# Altium PCB version2.PcbDoc
Units mm, origin at the board's own origin, x right, y up, seen from the top; angles counter-clockwise.
Board outline 50.95 x 56.2 mm, 4 copper layers (Top Layer, Int1 (GND), Int2 (PWR), Bottom Layer), stack 1.586 mm thick; 28 components, 19 nets, 139 pads, 147 vias.
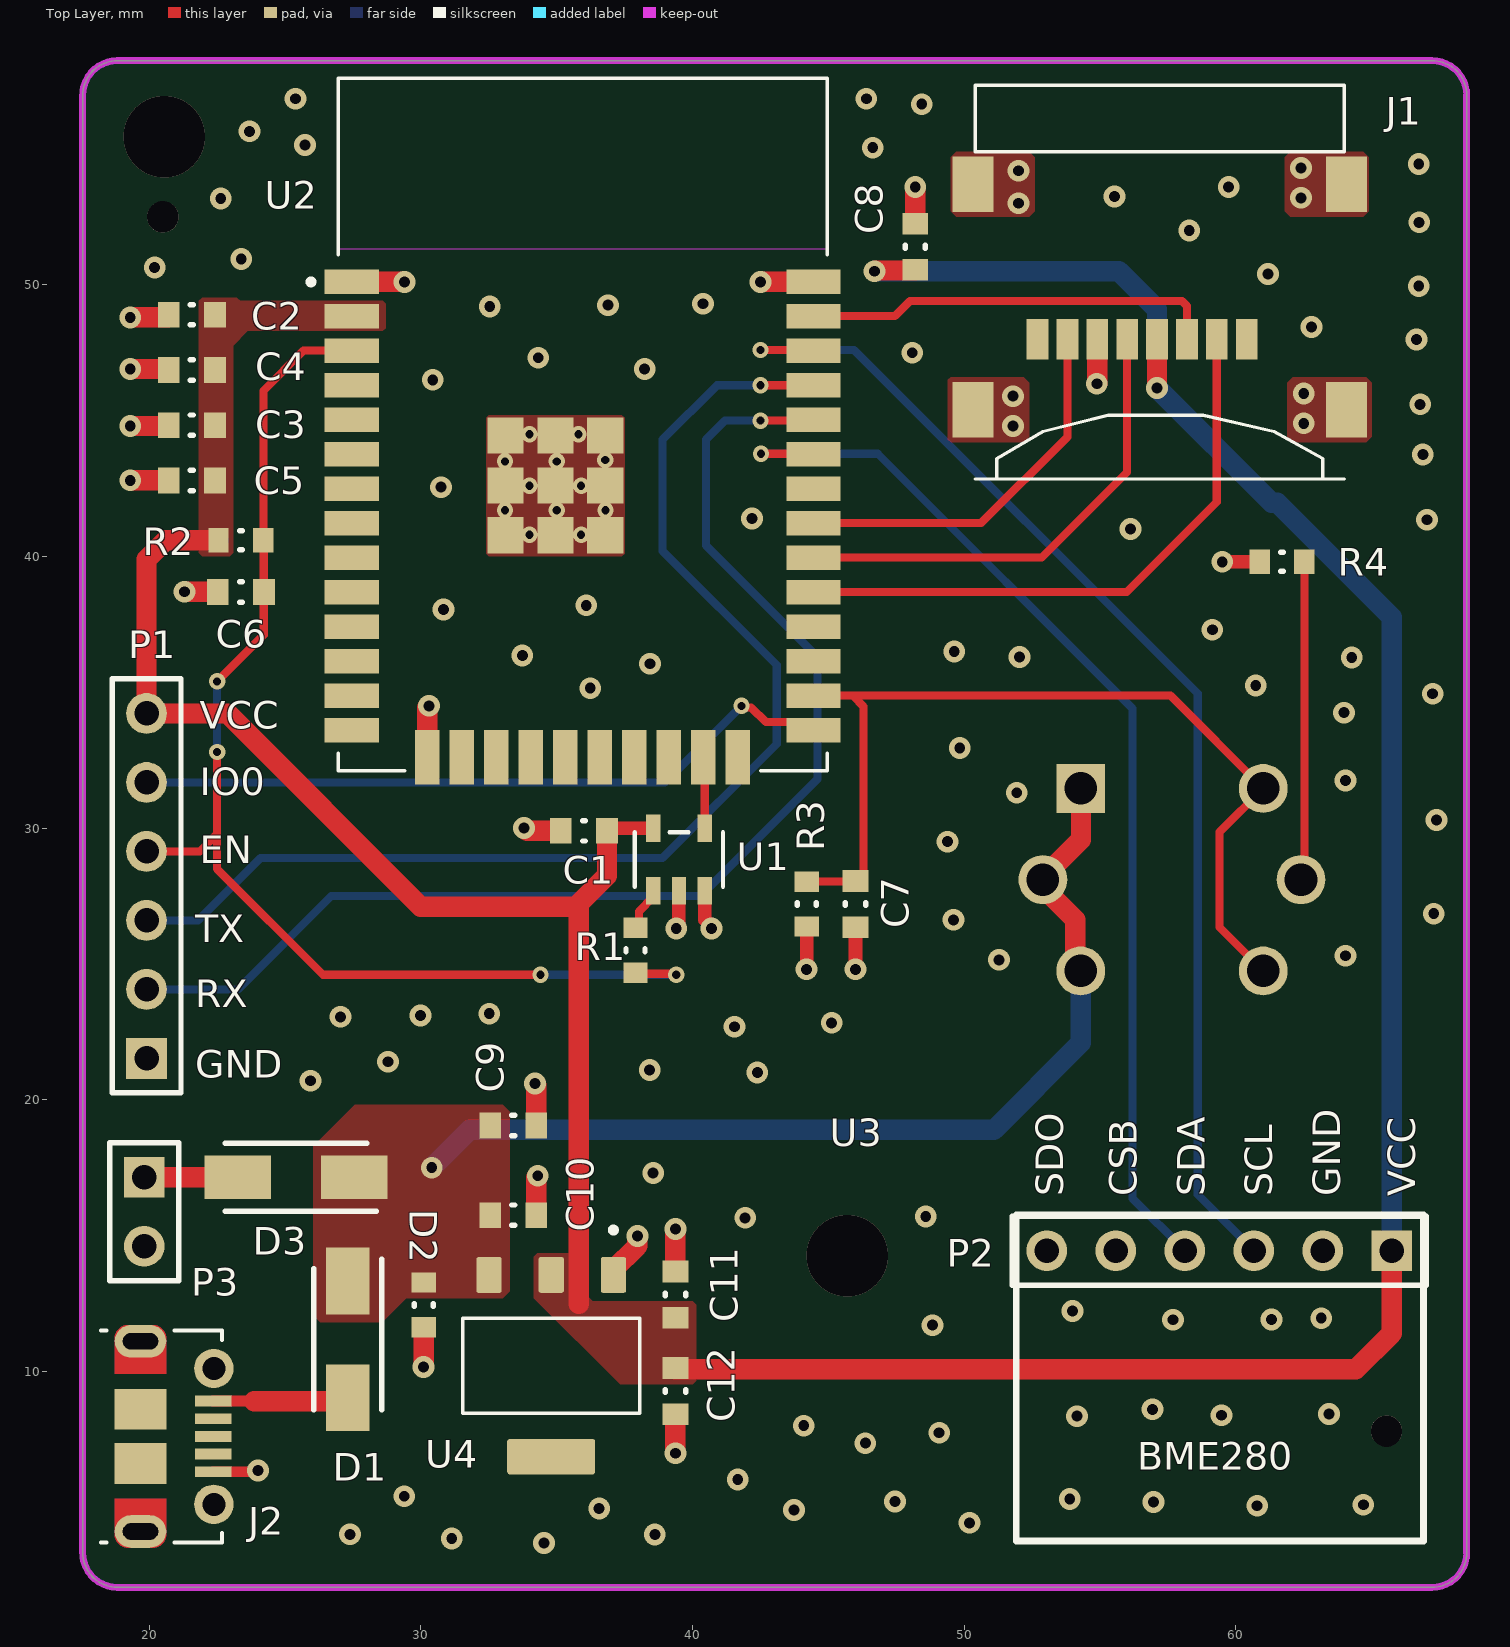
[diagram p0: Top Layer view]
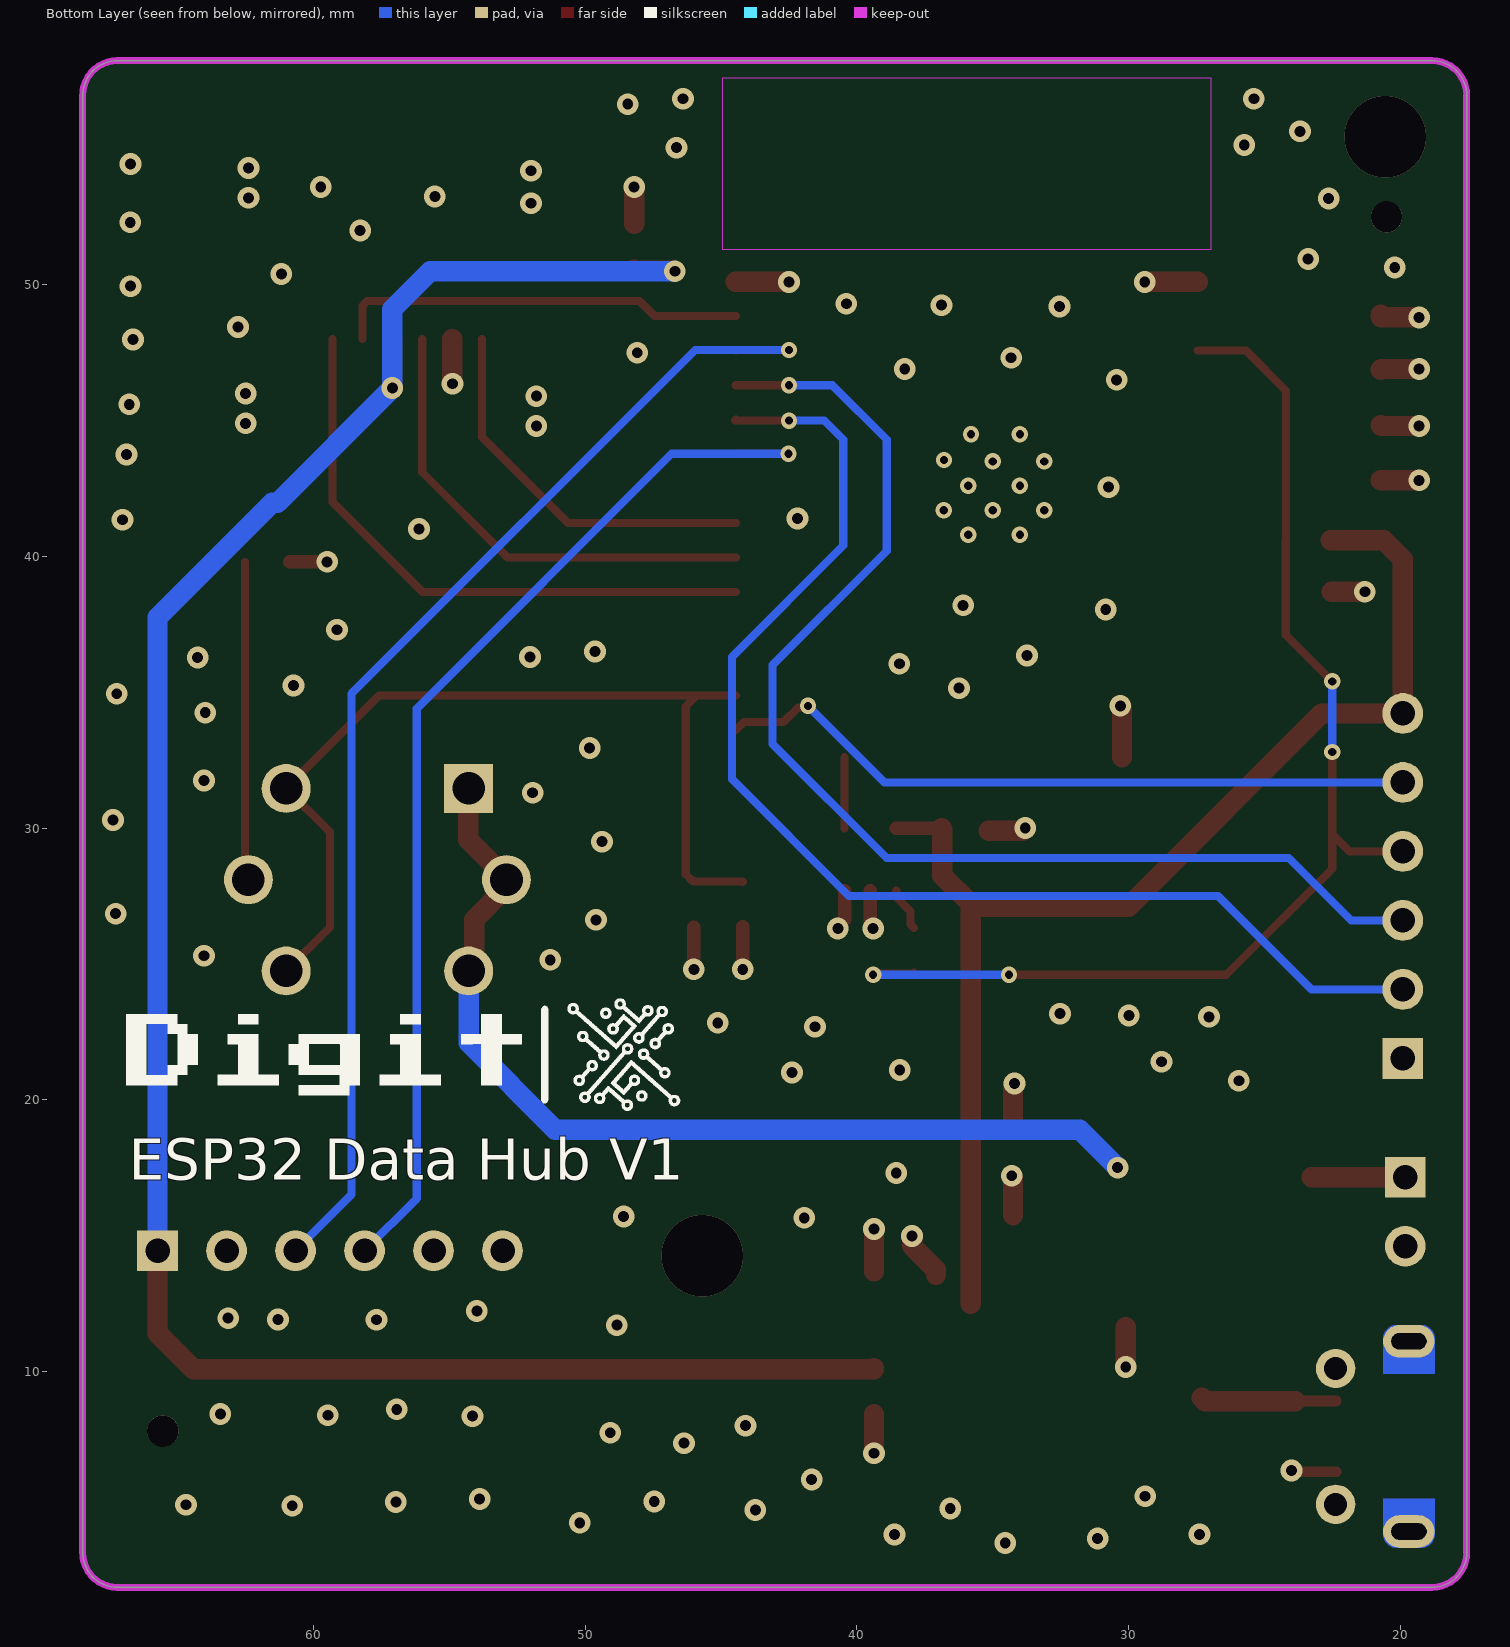
[diagram p1: Bottom Layer view, seen from below]
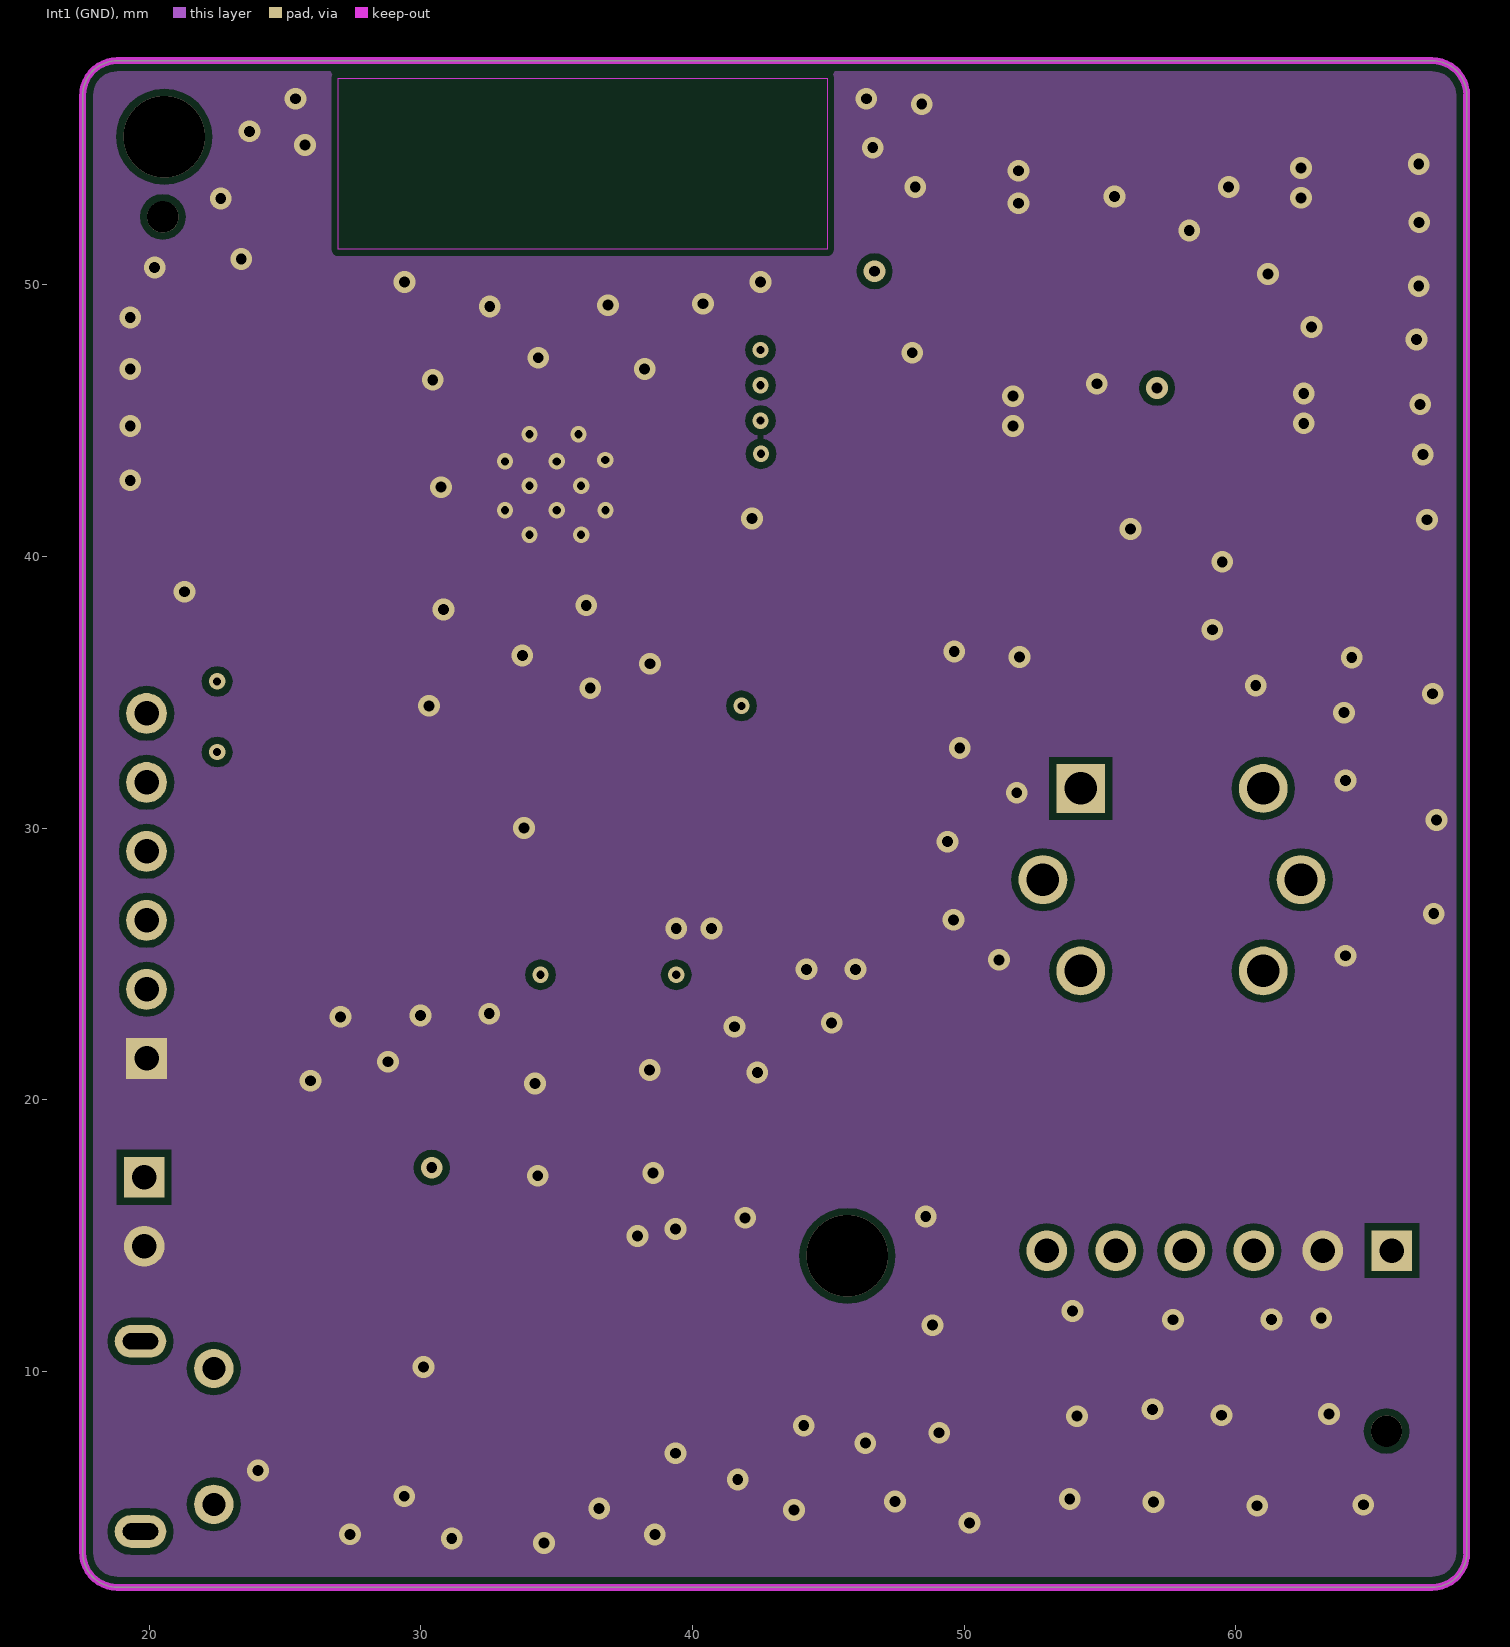
[diagram p2: Int1 (GND)]
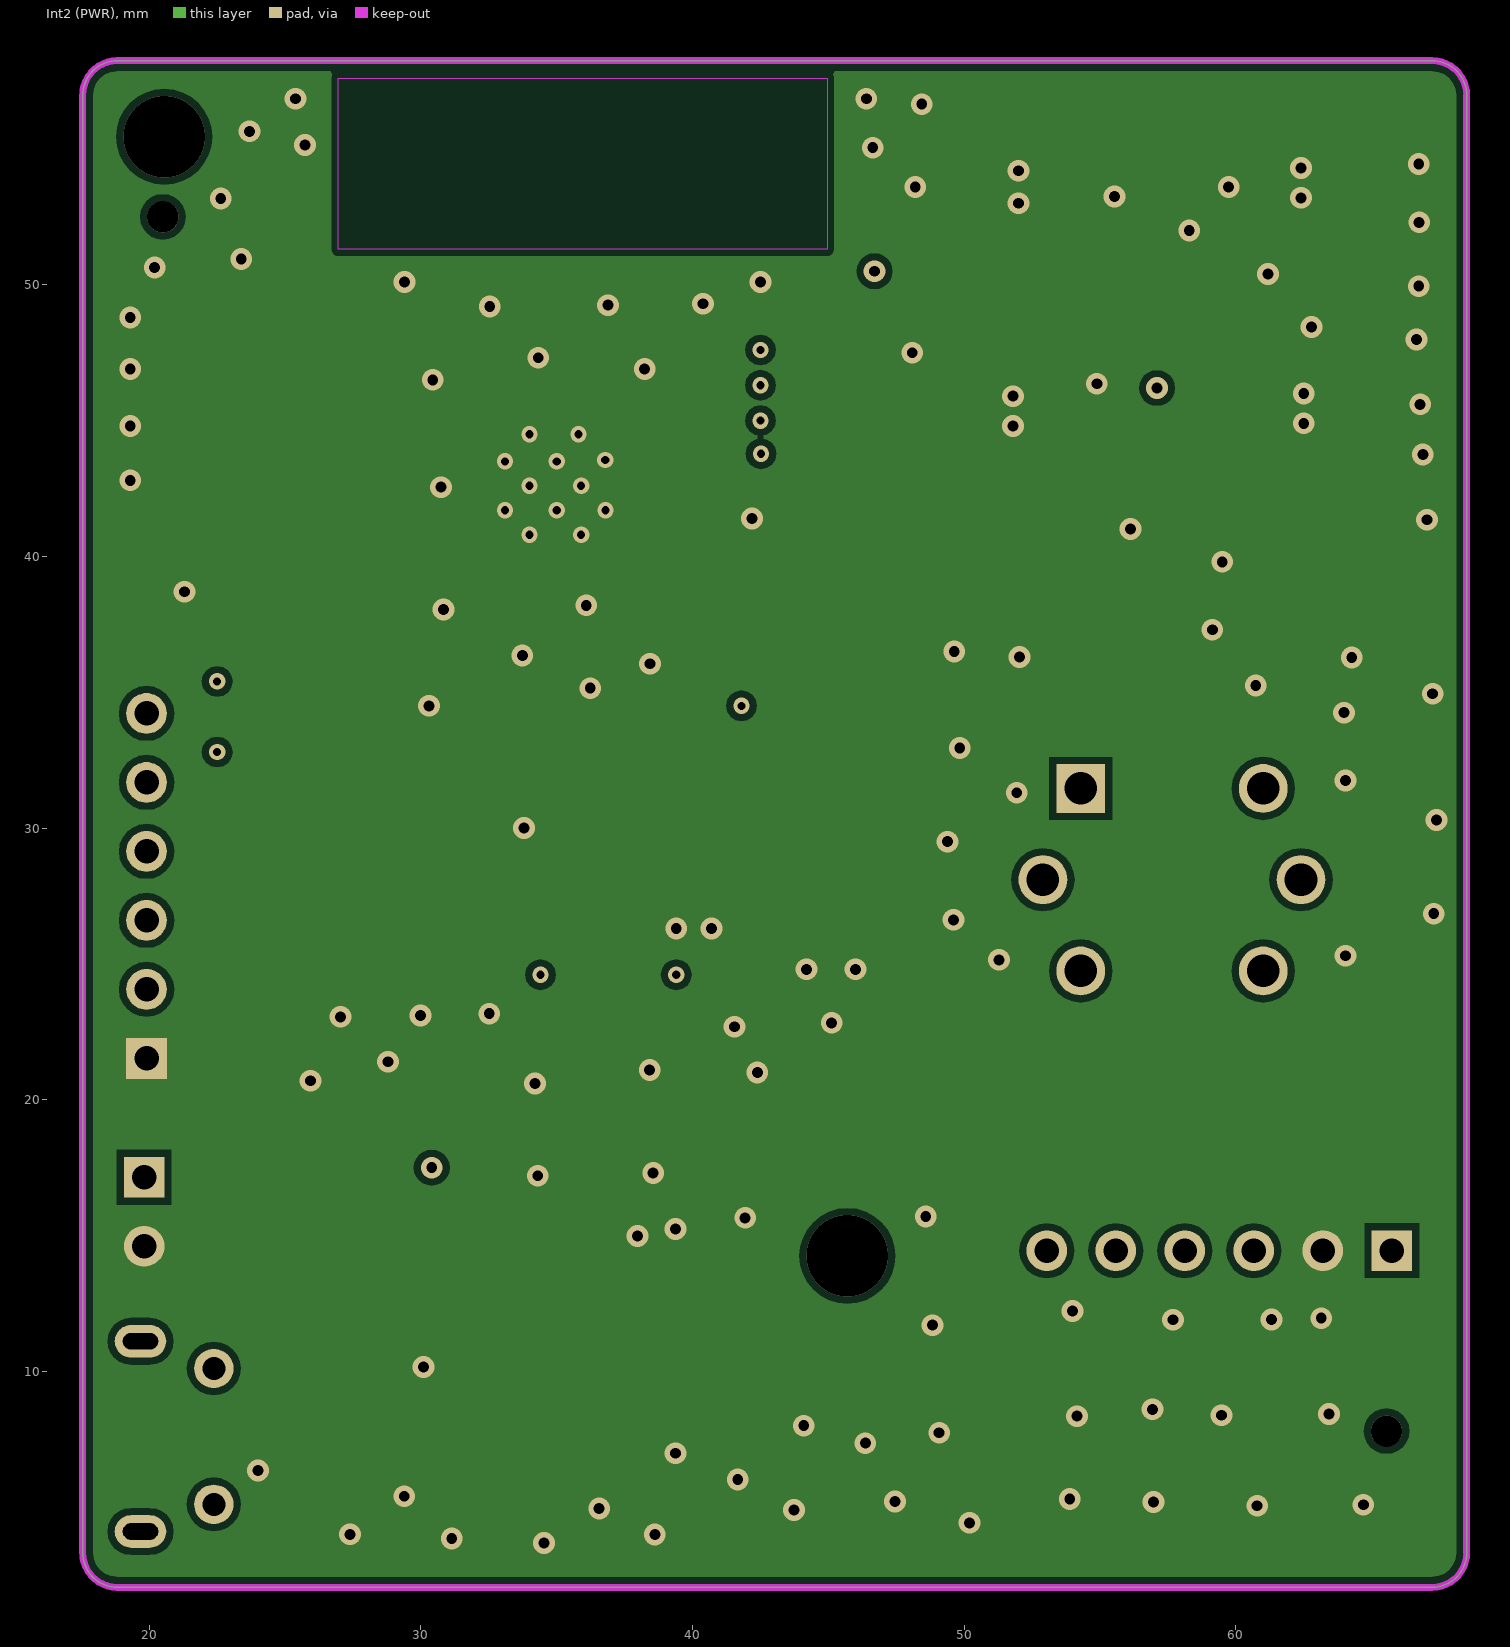
[diagram p3: Int2 (PWR)]
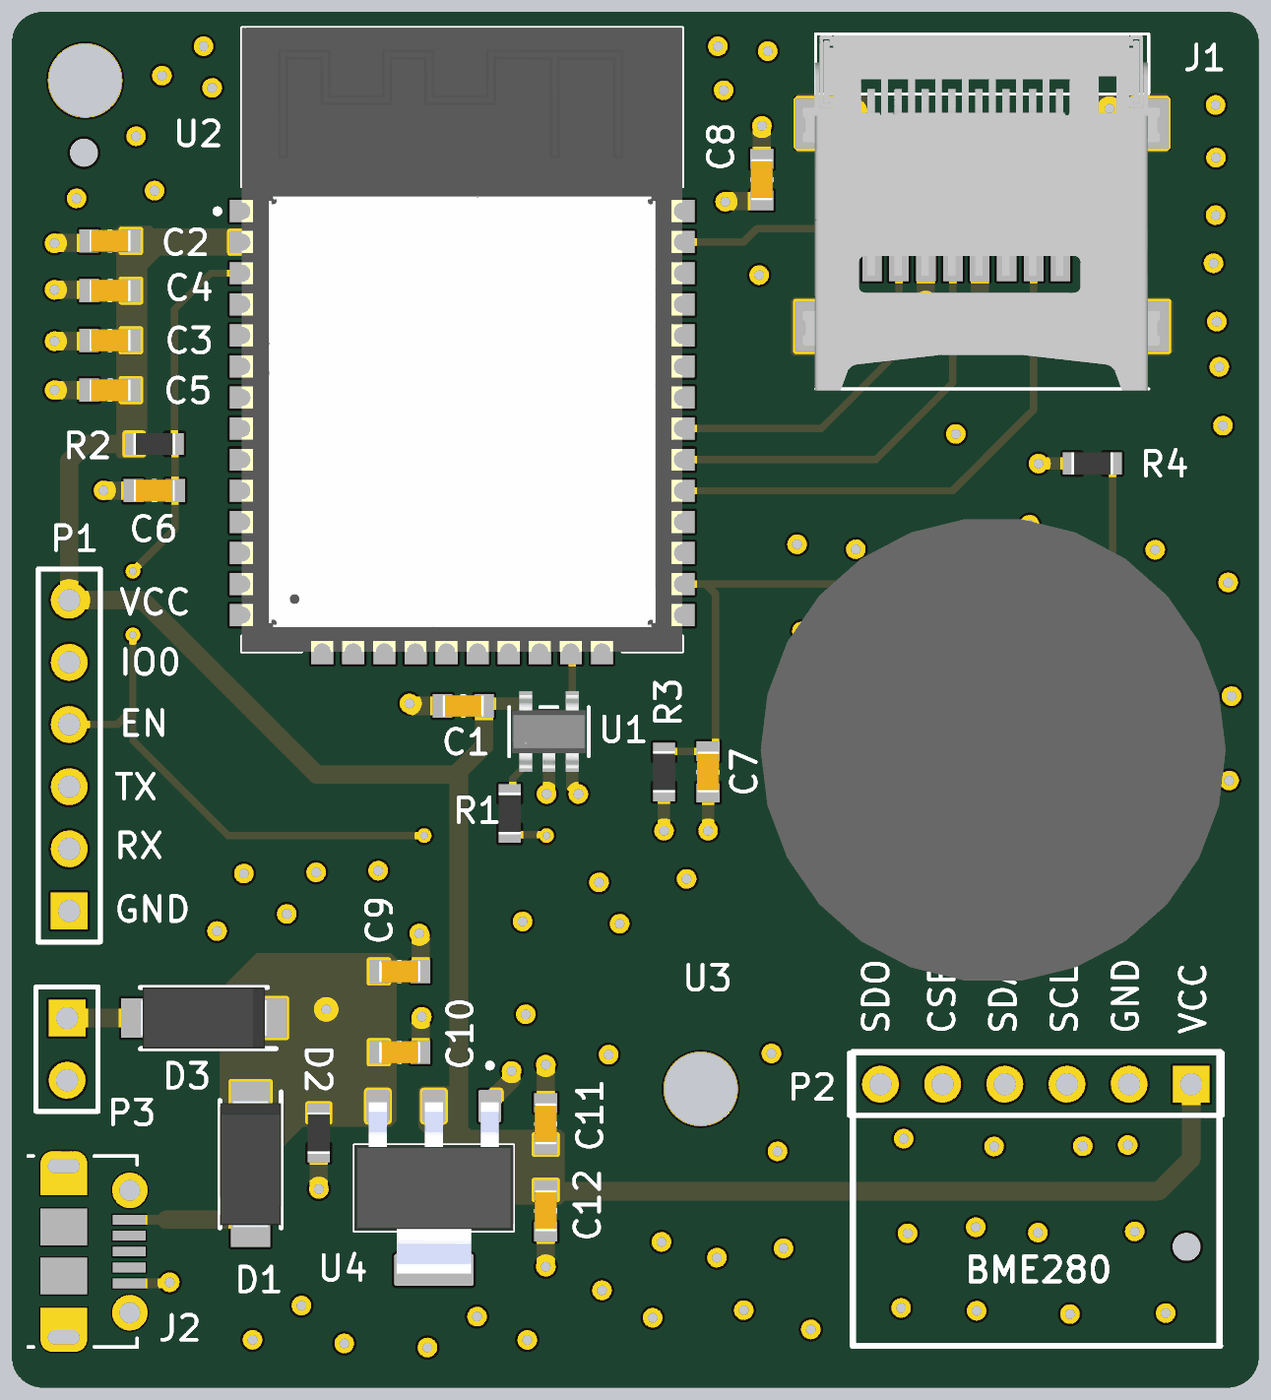
[diagram p4: 3D render of the assembled board from above, using the file's embedded part models]

## Layer stack, top to bottom
Top Solder: solder mask 0.0254, SM-001, Dk 4
Top Layer: signal copper 0.035
Dielectric 1: prepreg 0.2104, PP-017, Dk 4.6
Int1 (GND): signal copper 0.0152
Dielectric 3: core 1.065, Core-039, Dk 4.6
Int2 (PWR): signal copper 0.0152
Dielectric 5: prepreg 0.2104, PP-017, Dk 4.6
Bottom Layer: signal copper 0.035
Bottom Solder: solder mask 0.0254, SM-001, Dk 4

## Board outline
17.55,3.32 ccw(c18.82,3.32) 18.82,2.05 67.23,2.05 ccw(c67.23,3.32) 68.5,3.32 68.5,56.98 ccw(c67.23,56.98) 67.23,58.25 18.82,58.25 ccw(c18.82,56.98) 17.55,56.98

## Design rules (kind name [scope] priority, off if disabled: settings)
Clearance keepout [IsKeepOut] p1: gap=0.254 ignorepadtopadclearanceinfootprint=FALSE
Clearance [All] p2: gap=0.254 ignorepadtopadclearanceinfootprint=FALSE except(0: Arc-Hole Track-Hole SMDPad-Hole THPad-Hole Fill-Hole Poly-Hole Region-Hole Text-Hole; 0.127: SMDPad-SMDPad; 0.15: SMDPad-Text; 0.2: Arc-SMDPad Arc-THPad Track-SMDPad Track-THPad; 0.5: THPad-THPad Via-Hole)
PolygonConnect PowerPuddleConnect [All] p1: connectstyle=Direct reliefconductorwidth=0.254 reliefentries=4 polygonreliefangle="90 Angle" airgapwidth=0.254
PolygonConnect PowerPlaneConnect [(InNamedPolygon('InternalGndLayer1') AND InNamedPolygon('InternalGndLayer2'))] p2: connectstyle=Relief reliefconductorwidth=0.254 reliefentries=4 polygonreliefangle="90 Angle" airgapwidth=0.254
RoutingVias [All] p1: holewidth=0.3 width=0.3 viastyle="Through Hole" minholewidth=0.2 minwidth=0.25 maxholewidth=6.3 maxwidth=6.3
SolderMaskExpansion [All] p1: expansion=0.102 istentingtop=FALSE
Width [All] p1: maxlimit=1 minlimit=0.127 preferedwidth=0.3
30 further rules are at their usual default settings.

## Classes and differential pairs
component class main: C1 C2 C3 C4 C5 C6 C7 C8 C9 C10 C11 C12 D1 D2 D3 J1 J2 P2 P3 R1 R2 R3 R4 U1 U3 U4

## Components (designator, comment, footprint, x,y, rotation, side; value= is the part's Value field where it differs from the comment)
C1 "100nF" CAP_0603 36,29.9 r180 top
C2 "100nF" CAP_0603 21.567,48.897 r0 top
C3 "100nF" CAP_0603 21.567,44.833 r0 top
C4 "100nF" CAP_0603 21.567,46.865 r0 top
C5 "10uF" CAP_0603 21.567,42.801 r0 top
C6 "100nF" CAP_0603 23.375,38.695 r0 top
C7 "100nF" CAP_0603 46,27.2 r90 top
C8 "100nF" CAP_0603 48.2,51.4 r90 top
C9 "10uF" CAP_0603 33.401,19.05 r180 top
C10 "100nF" CAP_0603 33.401,15.748 r180 top
C11 "100nF" CAP_0603 39.37,12.827 r270 top
C12 "10uF" CAP_0603 39.37,9.271 r90 top
D1 "CDBA240LL-HF" DIOM5225X250N 27.305,11.176 r270 top
D2 "SLESDL0603-12" TVS0603 30.099,12.446 r90 top
D3 "CDBA240LL-HF" DIOM5225X250N 25.4,17.145 r180 top
J1 "47219-2001" 47219-2001 60.4,48 r0 top
J2 "1050170001" MOLEX-1050170001 19.677,8.605 r270 top
P1 "Header 6" HDR1X6 19.9,21.52 r90 top
P2 "Header 6" HDR1X6 65.744,14.442 r180 top
P3 "Header 2" HDR1X2 19.812,17.145 r270 top
R1 "10k" RES_0603 37.9,25.5 r270 top
R2 "10k" RES_0603 23.375,40.6 r180 top
R3 "47k" RES_0603 44.2,27.2 r90 top
R4 "5.1R" RES_0603 61.7,39.8 r0 top
U1 "STWD100YNYWY3F" STWD100YNYWY3F 38.55,27.7 r90 top
U2 "ESP32-WROOM-32" ESP32-WROOM-32-Nx 27.453,50.117 r0 top
U3 "SEN-17049" SEN17049 54.291,31.459 r0 top
U4 "AMS1117-3.3" SOT229P700X180-4N 37.088,13.548 r270 top

## Footprints (in the part's own frame and the unit in brackets; to place one, negate y for a bottom-side part, rotate by r counter-clockwise, add the part's x,y. Pads: shape width x height; smd on the part's side, far side on the other; paste and mask are expansions set on the pad)
47219-2001 [mm] "Molex microSD"
  rect 0.8x1.5 smd: 1(0,0) 2(-1.1,0) 3(-2.2,0) 4(-3.3,0) 5(-4.4,0) 6(-5.5,0) 7(-6.6,0) 8(-7.7,0)
  rect 1.5x2.05 smd: G1(3.675,-2.6) G2(3.675,5.7) G3(-10.075,5.7) G4(-10.075,-2.6)
  silkscreen extent -10,-5.15 3.6,9.35, body extent -10.54,-5.22 4.06,9.28, height 1.87
CAP_0603 [mm] "Chip Capacitor, 2-Leads, Body 1,60x0,80mm, IPC Medium Density, 0603"
  rect 0.8x0.95 smd: 1(-0.85,0) 2(0.85,0)
  silkscreen extent -0.05,-0.38 0.05,0.38, body extent -0.85,-0.45 0.85,0.45, height 0.6
DIOM5225X250N [mm]
  rect 2.45x1.6 smd: 1(-2.15,0) 2(2.15,0)
  silkscreen extent -2.95,-1.25 2.6,1.25, body extent -2.6,-1.25 2.6,1.25, height 2.5
ESP32-WROOM-32-Nx [mm] "SMD,18x25.5mm"
  rect 2x0.9 smd: 1(0,0) 2(0,-1.27) 3(0,-2.54) 4(0,-3.81) 5(0,-5.08) 6(0,-6.35) 7(0,-7.62) 8(0,-8.89) 9(0,-10.16) 10(0,-11.43) 11(0,-12.7) 12(0,-13.97) 13(0,-15.24) 14(0,-16.51) 25(17,-16.51) 26(17,-15.24) 27(17,-13.97) 28(17,-12.7) 29(17,-11.43) 30(17,-10.16) 31(17,-8.89) 32(17,-7.62) 33(17,-6.35) 34(17,-5.08) 35(17,-3.81) 36(17,-2.54) 37(17,-1.27) 38(17,0)
  rect 0.9x2 smd: 15(2.785,-17.51) 16(4.055,-17.51) 17(5.325,-17.51) 18(6.595,-17.51) 19(7.865,-17.51) 20(9.135,-17.51) 21(10.405,-17.51) 22(11.675,-17.51) 23(12.945,-17.51) 24(14.215,-17.51)
  rect 1.33x1.33 smd: 39(5.665,-9.335) 39(5.665,-7.5) 39(5.665,-5.665) 39(7.5,-9.335) 39(7.5,-7.5) 39(7.5,-5.665) 39(9.335,-9.335) 39(9.335,-7.5) 39(9.335,-5.665)
  Keep-Out Layer region: 17.5,1.19 -0.5,1.19 -0.5,7.49 17.5,7.49
  silkscreen extent -1.6,-18.01 17.5,7.49, body extent -0.5,-18.01 17.5,7.49, height 3.25
HDR1X2 [mm] "Connector; Header; 2 Position"
  rect 1.5x1.5 hole 0.9: 1(0,0)
  round 1.5 hole 0.9: 2(2.54,0)
  silkscreen extent -1.27,-1.27 3.81,1.27
HDR1X6 [mm] "Connector; Header; 6 Position"
  rect 1.5x1.5 hole 0.9: 1(0,0)
  round 1.5 hole 0.9: 2(2.54,0) 3(5.08,0) 4(7.62,0) 5(10.16,0) 6(12.7,0)
  silkscreen extent -1.27,-1.27 13.97,1.27
MOLEX-1050170001 [mm]
  rect 0.4x1.35 smd mask+0.064: 1(-0.3,2.675) 2(0.35,2.675) 3(1,2.675) 4(1.65,2.675) 5(2.3,2.675)
  oval 1.2x1.9 hole 0.6 slot 1.3 at 90 deg mask+0: SH(-2.5,0) SH(4.5,0)
  round 1.45 hole 0.85 mask+0.064: SH(-1.5,2.7) SH(3.5,2.7)
  rect 1.5x1.9 smd mask+0.064: SH(0,0) SH(2,0)
  Top Layer region: 4.626,0.949 4.652,0.947 4.678,0.944 4.704,0.939 4.729,0.933 4.755,0.926 4.779,0.917 4.803,0.907 4.827,0.896 4.85,0.883 4.872,0.869 4.894,0.855 4.915,0.839 4.935,0.822 4.954,0.804 4.972,0.785 4.989,0.765 5.005,0.744 5.019,0.722 5.033,0.7 5.046,0.677 5.057,0.653 5.067,0.629 5.076,0.605 5.083,0.579 5.089,0.554 5.094,0.528 5.097,0.502 5.099,0.476 5.1,0.45 5.1,-0.45 5.099,-0.476 5.097,-0.502 5.094,-0.528 5.089,-0.554 5.083,-0.579 5.076,-0.605 5.067,-0.629 5.057,-0.653 5.046,-0.677 5.033,-0.7 5.019,-0.722 5.005,-0.744 4.989,-0.765 4.972,-0.785 4.954,-0.804 4.935,-0.822 4.915,-0.839 4.894,-0.855 4.872,-0.869 4.85,-0.883 4.827,-0.896 4.803,-0.907 4.779,-0.917 4.755,-0.926 4.729,-0.933 4.704,-0.939 4.678,-0.944 4.652,-0.947 4.626,-0.949 4.6,-0.95 3.3,-0.95 3.3,0.95 4.6,0.95
  Top Layer region: -1.3,-0.95 -2.6,-0.95 -2.626,-0.949 -2.652,-0.947 -2.678,-0.944 -2.704,-0.939 -2.729,-0.933 -2.755,-0.926 -2.779,-0.917 -2.803,-0.907 -2.827,-0.896 -2.85,-0.883 -2.872,-0.869 -2.894,-0.855 -2.915,-0.839 -2.935,-0.822 -2.954,-0.804 -2.972,-0.785 -2.989,-0.765 -3.005,-0.744 -3.019,-0.722 -3.033,-0.7 -3.046,-0.677 -3.057,-0.653 -3.067,-0.629 -3.076,-0.605 -3.083,-0.579 -3.089,-0.554 -3.094,-0.528 -3.097,-0.502 -3.099,-0.476 -3.1,-0.45 -3.1,0.45 -3.099,0.476 -3.097,0.502 -3.094,0.528 -3.089,0.554 -3.083,0.579 -3.076,0.605 -3.067,0.629 -3.057,0.653 -3.046,0.677 -3.033,0.7 -3.019,0.722 -3.005,0.744 -2.989,0.765 -2.972,0.785 -2.954,0.804 -2.935,0.822 -2.915,0.839 -2.894,0.855 -2.872,0.869 -2.85,0.883 -2.827,0.896 -2.803,0.907 -2.779,0.917 -2.755,0.926 -2.729,0.933 -2.704,0.939 -2.678,0.944 -2.652,0.947 -2.626,0.949 -2.6,0.95 -1.3,0.95
  Bottom Layer region: -1.3,-0.95 -2.6,-0.95 -2.626,-0.949 -2.652,-0.947 -2.678,-0.944 -2.704,-0.939 -2.729,-0.933 -2.755,-0.926 -2.779,-0.917 -2.803,-0.907 -2.827,-0.896 -2.85,-0.883 -2.872,-0.869 -2.894,-0.855 -2.915,-0.839 -2.935,-0.822 -2.954,-0.804 -2.972,-0.785 -2.989,-0.765 -3.005,-0.744 -3.019,-0.722 -3.033,-0.7 -3.046,-0.677 -3.057,-0.653 -3.067,-0.629 -3.076,-0.605 -3.083,-0.579 -3.089,-0.554 -3.094,-0.528 -3.097,-0.502 -3.099,-0.476 -3.1,-0.45 -3.1,0.45 -3.099,0.476 -3.097,0.502 -3.094,0.528 -3.089,0.554 -3.083,0.579 -3.076,0.605 -3.067,0.629 -3.057,0.653 -3.046,0.677 -3.033,0.7 -3.019,0.722 -3.005,0.744 -2.989,0.765 -2.972,0.785 -2.954,0.804 -2.935,0.822 -2.915,0.839 -2.894,0.855 -2.872,0.869 -2.85,0.883 -2.827,0.896 -2.803,0.907 -2.779,0.917 -2.755,0.926 -2.729,0.933 -2.704,0.939 -2.678,0.944 -2.652,0.947 -2.626,0.949 -2.6,0.95 -1.3,0.95
  Bottom Layer region: 4.626,0.949 4.652,0.947 4.678,0.944 4.704,0.939 4.729,0.933 4.755,0.926 4.779,0.917 4.803,0.907 4.827,0.896 4.85,0.883 4.872,0.869 4.894,0.855 4.915,0.839 4.935,0.822 4.954,0.804 4.972,0.785 4.989,0.765 5.005,0.744 5.019,0.722 5.033,0.7 5.046,0.677 5.057,0.653 5.067,0.629 5.076,0.605 5.083,0.579 5.089,0.554 5.094,0.528 5.097,0.502 5.099,0.476 5.1,0.45 5.1,-0.45 5.099,-0.476 5.097,-0.502 5.094,-0.528 5.089,-0.554 5.083,-0.579 5.076,-0.605 5.067,-0.629 5.057,-0.653 5.046,-0.677 5.033,-0.7 5.019,-0.722 5.005,-0.744 4.989,-0.765 4.972,-0.785 4.954,-0.804 4.935,-0.822 4.915,-0.839 4.894,-0.855 4.872,-0.869 4.85,-0.883 4.827,-0.896 4.803,-0.907 4.779,-0.917 4.755,-0.926 4.729,-0.933 4.704,-0.939 4.678,-0.944 4.652,-0.947 4.626,-0.949 4.6,-0.95 3.3,-0.95 3.3,0.95 4.6,0.95
  silkscreen extent -2.9,-1.45 4.9,3
RES_0603 [mm] "Chip Resistor, 2-Leads, Body 1,60x0,80mm, IPC Medium Density, 0603"
  rect 0.75x0.9 smd: 1(-0.825,0) 2(0.825,0)
  silkscreen extent -0.05,-0.35 0.05,0.35, body extent -0.85,-0.45 0.85,0.45, height 0.6
SEN17049 [mm]
  rect 1.8x1.8 hole 1.2: 1(0,0)
  round 1.8 hole 1.2: 2(-1.391,-3.359) 3(0,-6.718) 4(6.718,-6.718) 5(8.109,-3.359) 6(6.718,0)
  body extent -6.14,-12.86 12.86,6.14, height 20.1
SOT229P700X180-4N [mm] "AMS1117-3.3"
  rrect15% 1.31x0.93 smd: 1(0,0) 2(0,-2.29) 3(0,-4.58)
  rrect15% 1.31x3.24 smd: 4(6.69,-2.29)
  silkscreen extent -1.75,-5.54 5.1,0.96, body extent -0.15,-5.54 6.84,0.96, height 1.8
STWD100YNYWY3F [mm] "SOT-23-5"
  rect 1.01x0.528 smd paste+0 mask+0: 1(0,0) 2(0,-0.95) 3(0,-1.9) 4(2.288,-1.9) 5(2.288,0)
  silkscreen extent 0.14,-2.58 2.15,0.68, body extent -0.36,-2.45 2.64,0.55, height 1.45
TVS0603 [mm] "SLESDL0603-12"
  rect 0.75x0.9 smd: 1(-0.825,0) 2(0.825,0)
  silkscreen extent -0.05,-0.35 0.05,0.35, body extent -0.85,-0.45 0.85,0.45, height 0.6

## Part data
C1 C2 C3 C4 C5 C6 C7 C8 C9 C10 C11 C12: library part Cap_0603, "Capacitor SMD 0603 Generic"
D1 D3: "Diode", Manufacturer_Name="Comchip Technology", Mouser Part Number=750-CDBA240LL-HF, Arrow Part Number=CDBA240LL-HF, Arrow Price/Stock=https://www.arrow.com/en/products/cdba240ll-hf/comchip-technology?region=nac, Datasheet Link=https://datasheet.datasheetarchive.com/originals/distributors/Datasheets-DGA22/1401764.pdf, Height=2.5mm, Manufacturer_Part_Number=CDBA240LL-HF, Mouser Price/Stock=https://www.mouser.co.uk/ProductDetail/Comchip-Technology/CDBA240LL-HF?qs=2qJf6qQ4IOK8%252BRkX5aZc7g%3D%3D
D2: library part TVSDiode0603, "Ultra low capacitance (1.5pF typ.) / Very low leakage current / Fast response time / Bi-directional / max.12V / C.V. = 100V max."
J1: library part "microSD Card Conn", "1.1mm Pitch microSD Card Connector, Hinge Type, Lead Free"
J2: library part Molex_1050170001, "USB - micro B USB 2.0 Receptacle Connector 5 Position Surface Mount, Right Angle; Through Hole"
P1 P2: "Header, 6-Pin", LatestRevisionDate=17-Jul-2002, LatestRevisionNote="Re-released for DXP Platform.", Publisher="Altium Limited"
P3: "Header, 2-Pin", LatestRevisionDate=17-Jul-2002, LatestRevisionNote="Re-released for DXP Platform.", Publisher="Altium Limited"
R1 R2 R3 R4: library part Res_0603, "Resistor SMD 0603 Generic"
U1: "1.12s Active Low 1 SOT-23-5 Monitors & Reset Circuits ROHS"
U2: library part ESP32-WROOM-32-Nx, "Bluetooth, WiFi 802.11b/g/n, Bluetooth v4.2 +EDR, Class 1, 2 and 3 Transceiver Module 2.4GHz ~ 2.5GHz PCB Trace Surface Mount"
U3: "Undefined or Miscellaneous", Manufacturer_Name=SparkFun, Mouser Part Number=474-SEN-17049, Arrow Part Number=SEN-17049, Arrow Price/Stock=https://www.arrow.com/en/products/sen-17049/sparkfun-electronics?region=nac, Datasheet Link=https://eu.mouser.com/datasheet/2/813/MQ_2-1915159.pdf, Height=20mm, Manufacturer_Part_Number=SEN-17049, Mouser Price/Stock=https://www.mouser.co.uk/ProductDetail/SparkFun/SEN-17049?qs=DPoM0jnrROWDFAIFRzjoUQ%3D%3D
U4: "Sot223/Pkg 1-Amp 3.3-Volt Low Drop Out Voltage Regulatator"

## Free pads (board coordinates)
  round 1.152 hole 1.152 unplated: TH(20.5,52.5) TH(65.55,7.8)

## Via types
v1: diameter 0.8, hole 0.4, Top Layer to Bottom Layer, 124 vias
v2: diameter 0.6, hole 0.3, Top Layer to Bottom Layer, 21 vias
v3: diameter 3, hole 3, Top Layer to Bottom Layer, 2 vias

## Nets (pads, with @x,y where several pads share a name; then routed paths per layer and width w, separated by ;. In a path a pad name is that pad's centre, name@x,y a point inside that pad or via, vN(x,y) a via of type N, cw(c..) or ccw(c..) an arc to the next point about the centre after c; other vN are vias at no path point)
3V3: C1.1 C2.2 C3.2 C4.2 C5.2 C8.1 C11.2 C12.2 J1.4 P1.6 P2.1 R2.2 U1.5 U2.2 U4.2 | length 129.7
  Top Layer w0.5: C1.1@36.875,29.988 U1.5
  Top Layer w0.75: R2.2 20.6,40.6 19.9,39.9 P1.6 22.88,34.22 30,27.1 35.7,27.1 ; 35.813,12.481 35.813,27.213 36.85,28.25 C1.1 36.85,29.963 C1.1@36.875,29.988 ; C12.2 39.37,10.071 64.421,10.071 65.744,11.394 P2.1 ; v1(46.7,50.5) 46.714,50.5 46.739,50.525 48.175,50.525 C8.1 ; v1(57.1,46.2) J1.4
  Bottom Layer w0.75: v1(46.7,50.5) 55.7,50.5 57.1,49.1 v1(57.1,46.2) 61.327,41.973 61.527,41.973 65.744,37.756 P2.1
5V_VBUS: C9.2 C10.2 D1.1 D2.2 D3.1 U3.1 U3.2 U3.3 U4.3 | length 36.3
  Top Layer w0.75: U3.3 54.09,24.942 54.09,26.626 52.9,27.816 U3.2 52.9,28.164 54.3,29.564 54.3,31.45 U3.1
  Bottom Layer w0.75: v1(30.4,17.5) 31.8,18.9 51.1,18.9 54.291,22.091 U3.3
A_OUT: C7.2 R3.2 U2.26 U3.4 U3.6 | length 35
  Top Layer w0.3: R3.2 44.212,28.037 45.988,28.037 C7.2 46.05,28.05 46.3,28.3 46.3,34.477 45.9,34.877 ; U2.26 45.9,34.877 ; U3.4 59.4,26.35 59.4,29.85 U3.6 57.591,34.877 45.9,34.877
cathbattery: D3.2 P3.1 | length 3.4
  Top Layer w0.75: P3.1 D3.2
cathusb: D1.2 J2.1 | length 5
  Top Layer w0.4: J2.1 23.861,8.905
  Top Layer w0.75: 23.861,8.905 27.184,8.905 D1.2
CS: J1.2 U2.29 | length 22.2
  Top Layer w0.3: U2.29 55.987,38.687 59.3,42 J1.2
EN: C6.2 P1.4 R1.2 R2.1 U2.3 | length 45.1
  Top Layer w0.3: P1.4 21.86,29.14 22.5,29.78 ; v2(22.5,32.8) 22.5,29.78 ; v2(22.5,35.4) 24.212,37.112 24.212,40.588 R2.1 24.2,46.1 25.677,47.577 U2.3 ; v2(34.4,24.6) 26.4,24.6 22.5,28.5 22.5,29.78 ; R1.2 37.938,24.637 39.362,24.637 v2(39.4,24.6)
  Bottom Layer w0.3: v2(22.5,32.8) v2(22.5,35.4) ; v2(34.4,24.6) v2(39.4,24.6)
GND: C1.2 C2.1 C3.1 C4.1 C5.1 C6.1 C7.1 C8.2 C9.1 C10.1 C11.1 C12.1 D2.1 J1.6 J1.G1 J1.G2 J1.G3 J1.G4 J2.5 P1.1 P2.2 P3.2 R3.1 R4.1 U1.2 U1.3 U2.1 U2.15 U2.38 U2.39 U4.1 | length 35.7
  Top Layer w0.4: J2.5 23.958,6.305 v1(24.003,6.35)
  Top Layer w0.5: v1(39.4,26.3) 39.4,26.381 39.5,26.481 U1.2 ; U1.3 40.45,26.631 40.7,26.381 v1(40.7,26.3) ; v1(44.2,24.8) R3.1 ; v1(46,24.8) C7.1 ; v1(59.5,39.8) R4.1
  Top Layer w0.75: v1@19.301,42.8 C5.1 ; v1(19.3,44.8) 20.692,44.8 20.717,44.825 C3.1 ; v1(19.3,46.9) 20.692,46.9 20.717,46.875 C4.1 ; v1(19.3,48.8) 19.31,48.81 20.692,48.81 20.717,48.835 C2.1 ; v1(21.3,38.7) 21.302,38.697 22.523,38.697 C6.1 ; U2.1 29.369,50.117 29.386,50.1 v1(29.4,50.1) ; v1(30.099,10.16) D2.1 ; U2.15 30.238,34.424 30.3,34.486 v1(30.3,34.5) ; v1(33.8,30) 33.814,30 33.914,29.9 C1.2 ; v1(34.2,20.6) 34.2,20.586 34.251,20.535 C9.1 ; C10.1 34.251,17.137 34.3,17.186 v1(34.3,17.2) ; U4.1 37.088,13.738 37.963,14.613 37.963,14.976 v1(37.973,14.986) ; v1(39.37,6.985) C12.1 ; C11.1 v1(39.37,15.24) ; v1(42.5,50.1) 42.514,50.1 42.531,50.117 U2.38 ; C8.2 v1(48.2,53.6) ; v1(54.885,46.358) 54.893,46.365 54.893,47.993 J1.6
  other v1: 34.535,3.685 31.136,3.85 27.386,4 38.612,3.995 50.2,4.424 43.736,4.9 36.562,4.948 60.786,5.05 64.696,5.091 56.971,5.187 47.458,5.211 53.886,5.3 29.386,5.4 41.664,6.021 46.361,7.357 49.079,7.738 44.096,8 54.15,8.35 59.475,8.382 63.433,8.429 56.936,8.6 48.836,11.7 57.686,11.9 61.311,11.91 63.147,11.958 53.991,12.22 41.936,15.65 48.586,15.7 38.55,17.3 25.936,20.7 42.386,21 38.422,21.09 28.786,21.4 41.545,22.687 45.121,22.83 27.036,23.05 29.986,23.1 32.519,23.167 51.286,25.15 64.036,25.3 49.604,26.621 67.286,26.85 49.386,29.5 67.386,30.3 51.936,31.3 64.036,31.75 49.836,32.95 63.986,34.25 67.247,34.943 36.236,35.15 60.736,35.25 38.436,36.05 64.267,36.278 52.036,36.3 33.736,36.35 49.636,36.5 59.136,37.3 30.836,38.05 36.086,38.2 56.122,41.01 67.036,41.35 42.186,41.4 30.736,42.55 19.3,42.8 66.886,43.75 51.8,44.8 62.5,44.9 66.786,45.6 51.8,45.9 62.5,46 30.436,46.5 38.236,46.9 34.321,47.317 48.086,47.5 66.651,47.984 62.786,48.45 32.536,49.2 36.886,49.25 40.386,49.3 66.736,49.95 61.186,50.4 20.199,50.636 23.386,50.95 58.286,52 66.75,52.3 52,53 22.631,53.174 62.4,53.2 55.536,53.25 59.736,53.6 52,54.2 62.4,54.3 66.736,54.45 46.636,55.05 25.736,55.15 23.686,55.65 48.436,56.65 25.386,56.85 46.4,56.85
  other v2: 34,40.8 35.9,40.8 33.1,41.7 35,41.7 36.8,41.7 34,42.6 35.9,42.6 33.1,43.5 35,43.5 36.79,43.547 34,44.5 35.8,44.5
IO0: P1.5 U2.25 | length 26.1
  Top Layer w0.3: v2(41.8,34.5) 41.857,34.443 42.157,34.443 42.7,33.9 44.16,33.9 U2.25
  Bottom Layer w0.3: P1.5 38.98,31.68 v2(41.8,34.5)
MISO: J1.7 U2.31 | length 14.3
  Top Layer w0.3: U2.31 50.627,41.227 53.8,44.4 J1.7
MOSI: J1.3 U2.37 | length 15.3
  Top Layer w0.3: U2.37 47.447,48.847 48,49.4 58.024,49.4 58.2,49.224 J1.3
mq2-5: R4.2 U3.5 | length 11.8
  Top Layer w0.3: U3.5 62.525,28.225 R4.2
RX: P1.2 U2.34 | length 46.4
  Top Layer w0.3: v2(42.5,45) 44.416,45 U2.34 U2.34@44.49,45
  Bottom Layer w0.3: P1.2 23.26,24.06 26.7,27.5 40.3,27.5 44.6,31.8 44.6,36.3 40.5,40.4 40.5,44.3 41.2,45 v2(42.5,45)
SCL: P2.3 U2.36 | length 44.7
  Top Layer w0.3: v2(42.5,47.6) 44.43,47.6 U2.36
  Bottom Layer w0.3: v2(42.5,47.6) 45.95,47.6 58.6,34.95 58.6,16.506 P2.3
SCLK: J1.5 U2.30 | length 17.7
  Top Layer w0.3: U2.30 52.857,39.957 56,43.1 J1.5
SDA: P2.4 U2.33 | length 40.3
  Top Layer w0.3: v2(42.518,43.781) 44.439,43.781 U2.33
  Bottom Layer w0.3: v2(42.518,43.781) 46.819,43.781 56.2,34.4 56.2,16.366 P2.4
TX: P1.3 U2.35 | length 45.2
  Top Layer w0.3: v2(42.5,46.3) 44.446,46.3 U2.35 U2.35@44.46,46.3
  Bottom Layer w0.3: P1.3 21.8,26.6 24.1,28.9 38.9,28.9 43.1,33.1 43.1,36 38.9,40.2 38.9,44.3 40.9,46.3 v2(42.5,46.3)
WDI: U1.4 U2.23 | length 2.6
  Top Layer w0.3: U1.4 U2.23@40.45,32.607
WDO_R: R1.1 U1.1 | length 1.6
  Top Layer w0.3: R1.1 38.025,26.45 38.025,26.934 38.55,27.459 U1.1
pads on no net: J1.1 J1.8 J2.2 J2.3 J2.4 J2.SH P2.5 P2.6 U2.4 U2.5 U2.6 U2.7 U2.8 U2.9 U2.10 U2.11 U2.12 U2.13 U2.14 U2.16 U2.17 U2.18 U2.19 U2.20 U2.21 U2.22 U2.24 U2.27 U2.28 U2.32 U4.4
copper on no net:
  other v3: 45.7,14.25 20.55,55.45

## Polygon pours and split planes (outlines as drawn)
GND on Top Layer "GND_L01_P016" (solid, pour order 16): 62.1,44.2 61.9,44.4 61.9,46.4 62.1,46.6 64.8,46.6 65,46.4 65,44.4 64.8,44.2
GND on Top Layer "GND_L01_P015" (solid, pour order 15): 62,52.5 61.8,52.7 61.8,54.7 62,54.9 64.7,54.9 64.9,54.7 64.9,52.7 64.7,52.5
GND on Top Layer "GND_L01_P014" (solid, pour order 14): 52.4,54.9 52.6,54.7 52.6,52.7 52.4,52.5 49.7,52.5 49.5,52.7 49.5,54.7 49.7,54.9
GND on Top Layer "GND_L01_P013" (solid, pour order 13): 52.2,46.6 52.4,46.4 52.4,44.4 52.2,44.2 49.5,44.2 49.4,44.3 49.4,46.5 49.5,46.6
3V3 on Top Layer "3V3_L01_P011" (solid, pour order 11): 21.817,40.134 21.944,40.007 22.96,40.007 23.087,40.134 23.087,47.754 23.633,48.3 28.6,48.3 28.7,48.4 28.7,49.3 28.595,49.405 23.341,49.405 23.214,49.532 21.944,49.532 21.817,49.405
GND on Top Layer "GND_L01_P012" (solid, pour order 12): 32.4,40.1 32.5,40 37.4,40 37.5,40.1 37.5,45.1 37.4,45.2 32.5,45.2 32.4,45.1
5V_VBUS on Top Layer "5V_VBUS_L01_P000" (solid, remove dead copper, pour order 0): 26.035,12.065 26.289,11.811 28.575,11.811 29.464,12.7 33.02,12.7 33.274,12.954 33.274,19.558 33.02,19.812 27.559,19.812 26.035,18.288
3V3 on Top Layer "3V3_L01_P010" (solid, pour order 10): 35.6,13.3 36.327,12.573 40.005,12.573 40.132,12.446 40.132,9.652 40.005,9.525 37.338,9.525 34.163,12.7 34.163,14.224 34.29,14.351 35.549,14.351 35.6,14.3
GND on Int2 (PWR) "GND_L03_P019" (solid, remove dead copper, pour order 19): 17.55,3.32 ccw(c18.82,3.32) 18.82,2.05 67.23,2.05 ccw(c67.23,3.32) 68.5,3.32 68.5,56.98 ccw(c67.23,56.98) 67.23,58.25 18.82,58.25 ccw(c18.82,56.98) 17.55,56.98
GND on Int1 (GND) "GND_L02_P018" (solid, remove dead copper, pour order 18): 17.55,3.32 ccw(c18.82,3.32) 18.82,2.05 67.23,2.05 ccw(c67.23,3.32) 68.5,3.32 68.5,56.98 ccw(c67.23,56.98) 67.23,58.25 18.82,58.25 ccw(c18.82,56.98) 17.55,56.98

## Keep-outs
Keep-Out Layer:
  lines w0.254: 95.631,74.676 cw(c95.631,73.406) 96.901,73.406 ; 17.55,3.32 ccw(c18.82,3.32) 18.82,2.05 19.3,2.05 67.23,2.05 ccw(c67.23,3.32) 68.5,3.32 68.5,56.98 ccw(c67.23,56.98) 67.23,58.25 18.82,58.25 ccw(c18.82,56.98) 17.55,56.98 17.55,3.32

## Silkscreen, mask and mechanical layers (free items; w line width, h text height)
Top Overlay:
  lines w0.254: 66.904,3.752 66.904,15.752 ; 66.918,3.752 51.918,3.752 51.918,15.752 66.918,15.752
  text "VCC" at 21.852,33.652 h1.02
  text "IO0" at 21.852,31.202 h1.02
  text "EN" at 21.852,28.702 h1.02
  text "TX" at 21.7,25.8 h1.02
  text "RX" at 21.7,23.4 h1.02
  text "GND" at 21.7,20.8 h1.02
  text "SDO" at 53.65,16.45 h1.02 r90
  text "CSB" at 56.35,16.45 h1.02 r90
  text "SDA" at 58.85,16.45 h1.02 r90
  text "SCL" at 61.35,16.45 h1.02 r90
  text "GND" at 63.85,16.45 h1.02 r90
  text "VCC" at 66.6,16.45 h1.02 r90
  text "BME280" at 56.378,6.378 h1.02
Bottom Overlay:
  drawing of 20 lines, arcs and shapes, not listed
  text "ESP32 Data Hub V1" at 66.796,17.054 h1.52

## Text inside footprints (layer, text, board x,y; h text height)
U2: Mechanical 13 "ANTENNA" at 29.953,53.857 h1.02